# Altium PCB w32_dmx512-slaver_PCB.PcbDoc
Units mil, origin at the board's own origin, x right, y up, seen from the top; angles counter-clockwise.
Board outline 6000 x 4220 mil, 2 copper layers (Top Layer, Bottom Layer); 29 components, 34 nets, 120 pads, 0 vias.
Unrouted connection lines stored in the file: 54.
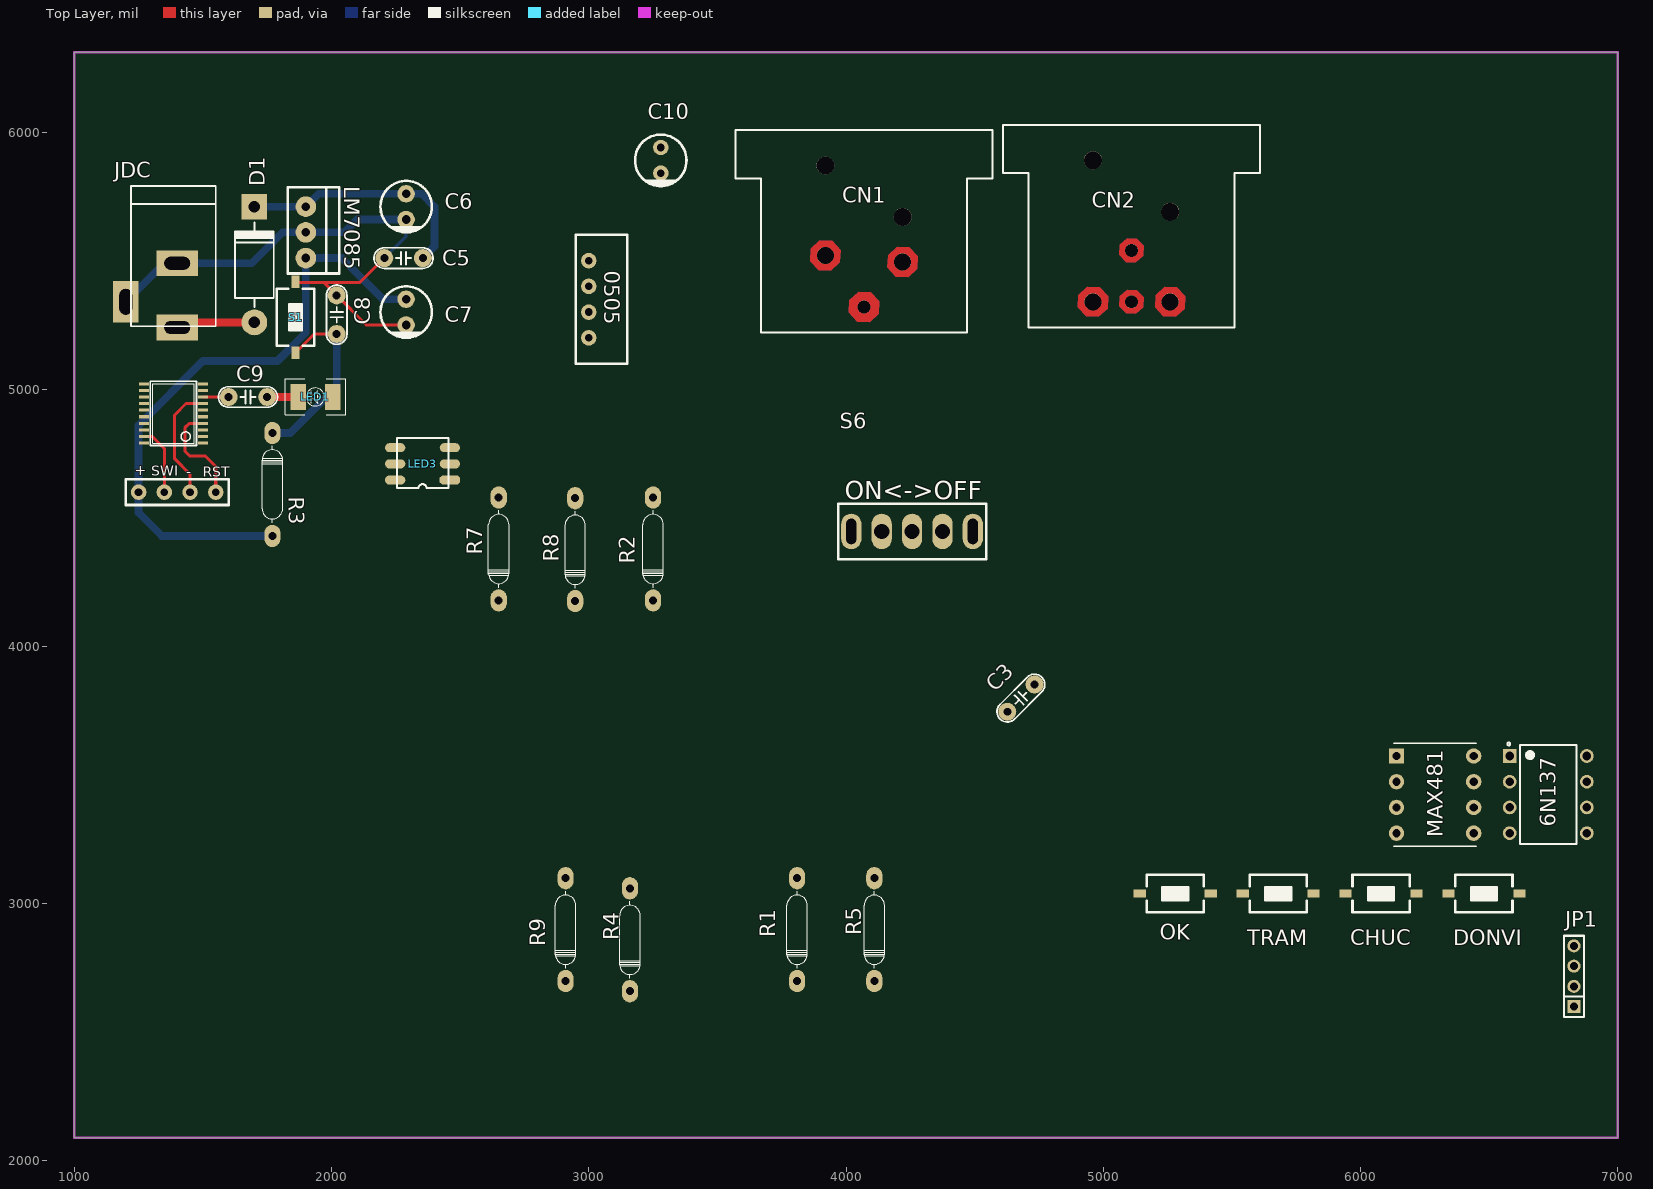
[diagram p0: Top Layer view]
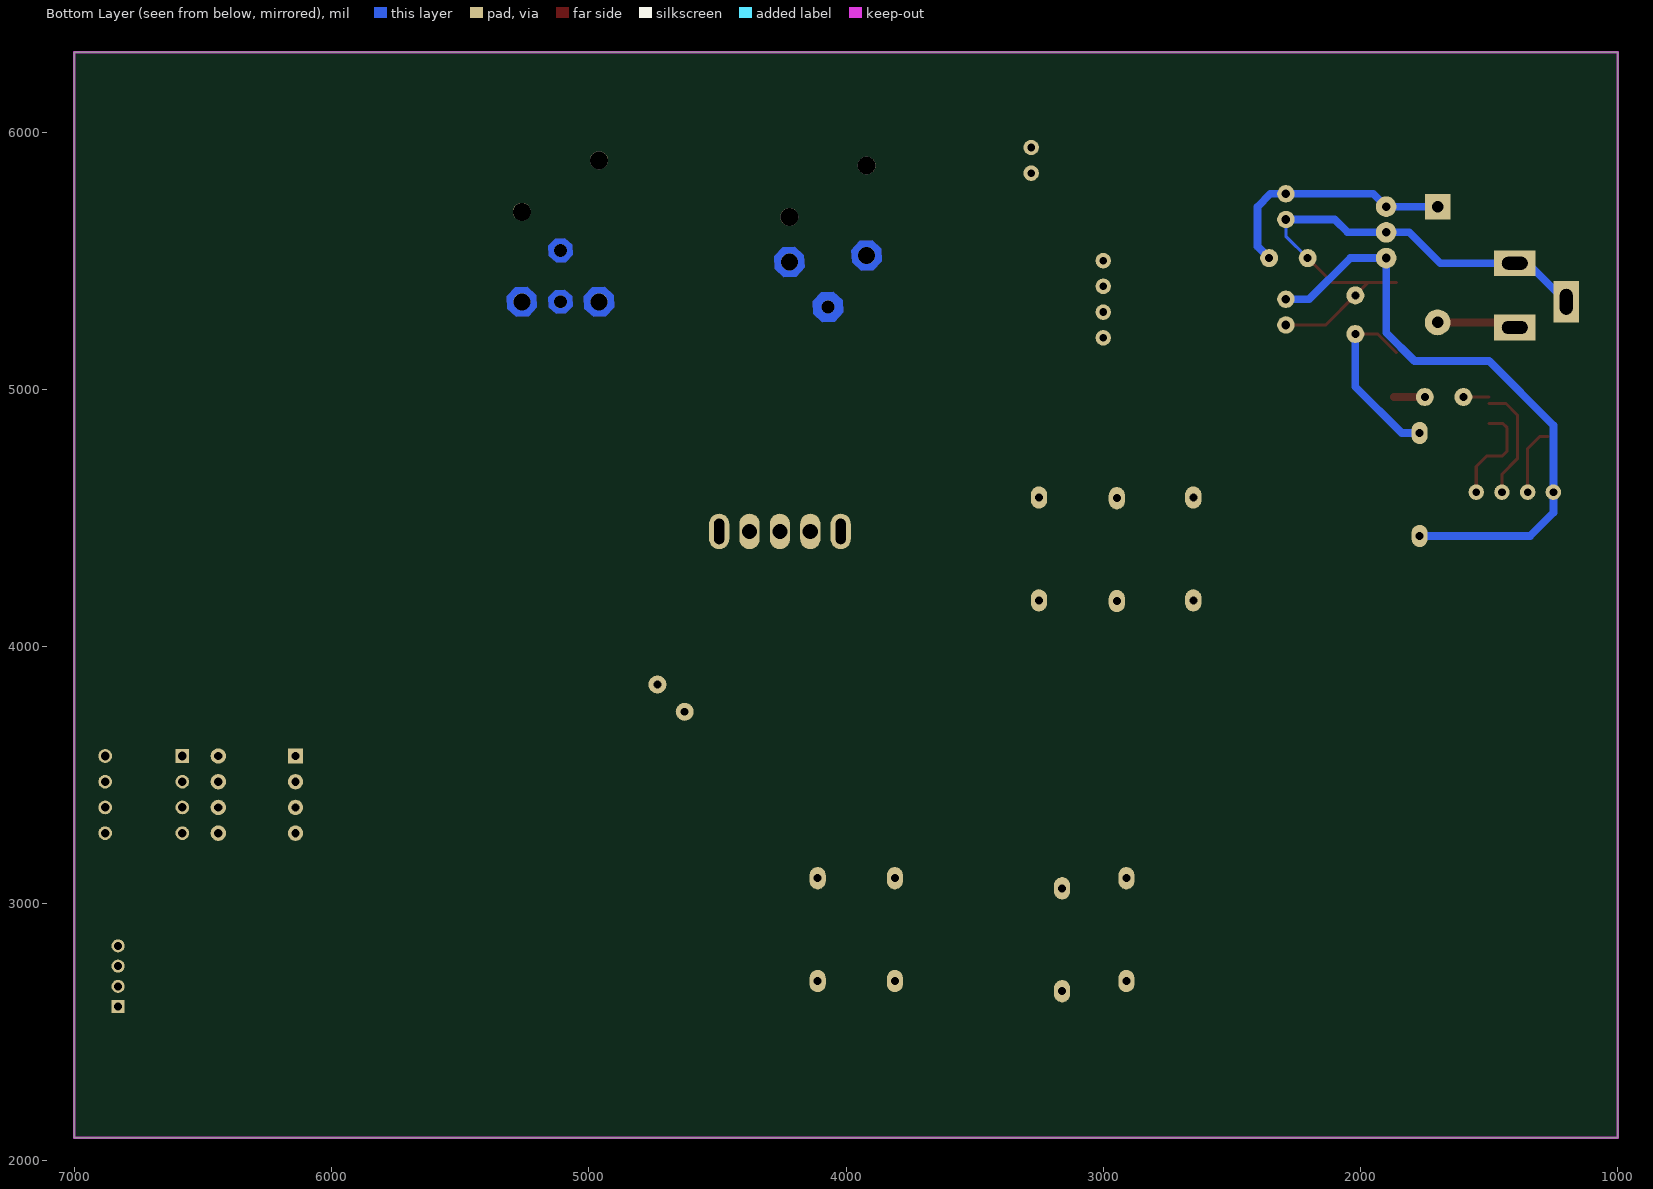
[diagram p1: Bottom Layer view, seen from below]

## Layer stack, top to bottom
Top Solder: solder mask 0.4, Solder Resist, Dk 3.5
Top Layer: signal copper 1.4
Dielectric 1: dielectric 12.6, FR-4, Dk 4.8
Bottom Layer: signal copper 1.4
Bottom Solder: solder mask 0.4, Solder Resist, Dk 3.5

## Board outline
1000,2090 1000,6310 7000,6310 7000,2090

## Design rules (kind name [scope] priority, off if disabled: settings)
Clearance [All] p1: gap=0 ignorepadtopadclearanceinfootprint=FALSE
PlaneConnect [All] p1: planeconnectstyle=Direct reliefexpansion=20 reliefentries=4 reliefconductorwidth=10 reliefairgap=10
PolygonConnect [All] p1: connectstyle=Direct reliefconductorwidth=10 reliefentries=4 polygonreliefangle="90 Angle" airgapwidth=10
RoutingVias [All] p1: holewidth=28 width=50 viastyle="Through Hole" minholewidth=28 minwidth=50 maxholewidth=28 maxwidth=50
SolderMaskExpansion [All] p1: expansion=4
Width [All] p1: maxlimit=30 minlimit=12 preferedwidth=20 minimp=50.000000 maximp=50.000000 favimp=50.000000
29 further rules are at their usual default settings.

## Components (designator, comment, footprint, x,y, rotation, side; value= is the part's Value field where it differs from the comment)
6N137 "6N137" DIP762W50P254L977H451Q8 6730,3424.37 r0 top
C3 "104" CN150 4680,3799.37 r45 top value=100nF
C5 "104" CN150 2280,5510 r0 top value=100nF
C8 "104" CN150 2020,5290 r90 top
C9 "104" CN150 1675,4970 r180 top
CHUC "SW-SMD" SW-SMD#1 6080,3039.37 r0 top
CN1 "NC3FBH1" NC3FBH1 4070,5520 r0 top
CN2 "NC3MBH" NC3MBH_NC3MBH(Primary) 5110,5540 r0 top
D1 "1N4007" D2A 1700,5710 r270 top
DONVI "SW-SMD" SW-SMD#1 6480,3039.37 r0 top
IC2 "STM8S003F3P6" TSSOP20 1385.13,4906.02 r90 top
JDC "Jac DC" DC-IN 1300,5365 r270 top
JP1 "JP4x1-2.0" J4-D1T 6830,2718.11 r90 top
LED1 "LED" LED-RED-0805 2005,4970 r180 top value="LED 3 - 5 ly 2 Colour"
LED3 "150141M173100" "LED RGB 5050" 2350,4710 r180 top
LM7085 "LM7805" 7805 1900,5610 r270 top
MAX481 "MAX481CPA" 21-0043D_8 6440,3274.37 r0 top
OK "SW-SMD" SW-SMD#2 5280,3039.37 r180 top
R1 "R0.4W" "DIEN TRO 1/4 W" 3810,2699.37 r90 top value=470
R2 "R0.4W" "DIEN TRO 1/4 W" 3250,4179.37 r90 top value=1k
R3 "R0.4W" "DIEN TRO 1/4 W" 1770,4830 r270 top value=1k
R4 "R0.4W" "DIEN TRO 1/4 W" 3160,2660 r90 top value=1k
R5 "R0.4W" "DIEN TRO 1/4 W" 4110,2699.37 r90 top value=470
R7 "R0.4W" "DIEN TRO 1/4 W" 2650,4179.37 r90 top value=1k
R8 "R0.4W" "DIEN TRO 1/4 W" 2947.16,4176.53 r90 top value=1k
R9 "R0.4W" "DIEN TRO 1/4 W" 2910,2699.37 r90 top value=120
S1 "SW-SMD" SW-SMD#1 1860,5280 r90 top
S6 "Switch" Switch 4020.67,4447.37 r0 top
TRAM "SW-SMD" SW-SMD#2 5680,3039.37 r180 top

## Footprints (in the part's own frame and the unit in brackets; to place one, negate y for a bottom-side part, rotate by r counter-clockwise, add the part's x,y. Pads: shape width x height; smd on the part's side, far side on the other; paste and mask are expansions set on the pad)
21-0043D_8 [mil]
  rect 60x60 hole 32: 1(-300,300)
  round 60 hole 32: 2(-300,200) 3(-300,100) 4(-300,0) 5(0,0) 6(0,100) 7(0,200) 8(0,300)
  silkscreen extent -310,-50 10,350
7805 [mil]
  round 80 hole 34: 1(-100,0) 2(0,0) 3(100,0)
  silkscreen extent -175,-70 160,130
CN150 [mil]
  round 70 hole 31: 1(-75,0) 2(75,0)
  silkscreen extent -115,-40 115,40, body extent -115,-33 115,33, height 235
D2A [mil] "Diode 2A, W 150mil, L 450mil"
  round 100 hole 45: 1(450,0)
  rect 100x100 hole 45: 2(0,0)
  silkscreen extent 61,-75 391,75, body extent 5,-47 435,54, height 100
DC-IN [mil] "Jac DC input"
  rect 100x160 hole 50 slot 100 at 90 deg: 1(125,100) 2(-125,100)
  rect 160x100 hole 50 slot 100 at 0 deg: 3(25,-100)
  silkscreen extent -425,-80 120,250, body extent -410,-105 134,269, height 434
"DIEN TRO 1/4 W" [mm]
  oval 2.2x1.6 hole 0.787: 1(0,0) 2(10.16,0)
  silkscreen extent 1.26,-1.02 8.88,1.02, body extent -0.3,-1.16 10.46,1.16, height 2.93
DIP762W50P254L977H451Q8 [mm]
  rect 1.35x1.35 hole 0.85: 1(-3.81,3.81)
  round 1.35 hole 0.85: 2(-3.81,1.27) 3(-3.81,-1.27) 4(-3.81,-3.81) 5(3.81,-3.81) 6(3.81,-1.27) 7(3.81,1.27) 8(3.81,3.81)
  silkscreen extent -4.04,-4.9 2.8,5.14
J4-D1T [mm] "4 pins, 1 row, straight, gold plating"
  rect 1.3x1.3 hole 0.8: 1(-3,0)
  round 1.3 hole 0.8: 2(-1,0) 3(1,0) 4(3,0)
  silkscreen extent -4,-1 4,1, body extent -4,-1 4,1, height 6.01
"LED RGB 5050" [mm]
  oct 2x0.9 smd: 1(-2.794,1.6)
  oval 2x0.9 smd: 2(-2.794,0) 3(-2.794,-1.6) 4(2.606,-1.6) 5(2.606,0) 6(2.606,1.6)
  silkscreen extent -2.67,-2.54 2.41,2.4, body extent -2.78,-2.54 2.52,2.46, height 1.6
LED-RED-0805 [mil]
  rect 60x100 smd: 1(0,0) 2(135,0)
  silkscreen extent -50,-70 185,70, body extent -20,-60 154,60, height 75
NC3FBH1 [mil]
  round 66 hole 66: 1(-150,0) 2(150,-25)
  round 50 hole 50: 3(0,-200)
  round 70 hole 70 unplated: None(-150,350) None(150,150)
  Top Layer region: -91.27,21.38 -123.59,56.64 -171.38,58.73 -206.64,26.41 -208.73,-21.38 -176.41,-56.64 -128.62,-58.73 -93.36,-26.41
  Top Layer region: 58.73,-178.62 26.41,-143.36 -21.38,-141.27 -56.64,-173.59 -58.73,-221.38 -26.41,-256.64 21.38,-258.73 56.64,-226.41
  Top Layer region: 208.73,-3.62 176.41,31.64 128.62,33.73 93.36,1.41 91.27,-46.38 123.59,-81.64 171.38,-83.73 206.64,-51.41
  Bottom Layer region: -91.27,21.38 -123.59,56.64 -171.38,58.73 -206.64,26.41 -208.73,-21.38 -176.41,-56.64 -128.62,-58.73 -93.36,-26.41
  Bottom Layer region: 58.73,-178.62 26.41,-143.36 -21.38,-141.27 -56.64,-173.59 -58.73,-221.38 -26.41,-256.64 21.38,-258.73 56.64,-226.41
  Bottom Layer region: 208.73,-3.62 176.41,31.64 128.62,33.73 93.36,1.41 91.27,-46.38 123.59,-81.64 171.38,-83.73 206.64,-51.41
  Multi-Layer region: -91.27,21.38 -123.59,56.64 -171.38,58.73 -206.64,26.41 -208.73,-21.38 -176.41,-56.64 -128.62,-58.73 -93.36,-26.41
  Multi-Layer region: 58.73,-178.62 26.41,-143.36 -21.38,-141.27 -56.64,-173.59 -58.73,-221.38 -26.41,-256.64 21.38,-258.73 56.64,-226.41
  Multi-Layer region: 208.73,-3.62 176.41,31.64 128.62,33.73 93.36,1.41 91.27,-46.38 123.59,-81.64 171.38,-83.73 206.64,-51.41
  silkscreen extent -500,-300 500,488
NC3MBH_NC3MBH(Primary) [mil]
  round 66 hole 66: 1(150,-200) 2(-150,-200)
  round 50 hole 50: 3(0,-200) G(0,0)
  round 70 hole 70 unplated: None(-150,350) None(150,150)
  Top Layer region: 208.73,-178.62 176.41,-143.36 128.62,-141.27 93.36,-173.59 91.27,-221.38 123.59,-256.64 171.38,-258.73 206.64,-226.41
  Top Layer region: 46.98,-182.9 21.13,-154.68 -17.1,-153.02 -45.32,-178.87 -46.98,-217.1 -21.13,-245.32 17.1,-246.98 45.32,-221.13
  Top Layer region: -91.27,-178.62 -123.59,-143.36 -171.38,-141.27 -206.64,-173.59 -208.73,-221.38 -176.41,-256.64 -128.62,-258.73 -93.36,-226.41
  Top Layer region: 46.98,17.1 21.13,45.32 -17.1,46.98 -45.32,21.13 -46.98,-17.1 -21.13,-45.32 17.1,-46.98 45.32,-21.13
  Bottom Layer region: 208.73,-178.62 176.41,-143.36 128.62,-141.27 93.36,-173.59 91.27,-221.38 123.59,-256.64 171.38,-258.73 206.64,-226.41
  Bottom Layer region: 46.98,-182.9 21.13,-154.68 -17.1,-153.02 -45.32,-178.87 -46.98,-217.1 -21.13,-245.32 17.1,-246.98 45.32,-221.13
  Bottom Layer region: -91.27,-178.62 -123.59,-143.36 -171.38,-141.27 -206.64,-173.59 -208.73,-221.38 -176.41,-256.64 -128.62,-258.73 -93.36,-226.41
  Bottom Layer region: 46.98,17.1 21.13,45.32 -17.1,46.98 -45.32,21.13 -46.98,-17.1 -21.13,-45.32 17.1,-46.98 45.32,-21.13
  Multi-Layer region: 208.73,-178.62 176.41,-143.36 128.62,-141.27 93.36,-173.59 91.27,-221.38 123.59,-256.64 171.38,-258.73 206.64,-226.41
  Multi-Layer region: 46.98,-182.9 21.13,-154.68 -17.1,-153.02 -45.32,-178.87 -46.98,-217.1 -21.13,-245.32 17.1,-246.98 45.32,-221.13
  Multi-Layer region: -91.27,-178.62 -123.59,-143.36 -171.38,-141.27 -206.64,-173.59 -208.73,-221.38 -176.41,-256.64 -128.62,-258.73 -93.36,-226.41
  Multi-Layer region: 46.98,17.1 21.13,45.32 -17.1,46.98 -45.32,21.13 -46.98,-17.1 -21.13,-45.32 17.1,-46.98 45.32,-21.13
  silkscreen extent -500,-300 500,488
SW-SMD#1 [mm] "Switch SMD type"
  rect 1.2x0.8 smd: 1(-3.5,0) 2(3.5,0)
  silkscreen extent -2.82,-1.85 2.82,1.85, body extent -3.05,-1.85 3.05,1.85, height 2.5
SW-SMD#2 [mm] "Switch SMD type"
  rect 1.2x0.8 smd: 1(3.5,0) 2(-3.5,0)
  silkscreen extent -2.82,-1.85 2.82,1.85, body extent -3.05,-1.85 3.05,1.85, height 2.5
Switch [mm]
  oval 2x3.5 hole 1.5: 1(3,0) 2(6,0) 3(9,0)
  oval 2x3.5 hole 1 slot 2.5 at 90 deg: 4(0,0) 5(12,0)
  silkscreen extent -1.27,-2.73 13.34,2.73, body extent -0.5,-2.85 12.5,9.35, height 2.6
TSSOP20 [mil]
  rect 12x39 smd: 1(-115.16,-114.87) 2(-89.57,-114.87) 3(-63.98,-114.87) 4(-38.39,-114.87) 5(-12.8,-114.87) 6(12.8,-114.87) 7(38.39,-114.87) 8(63.98,-114.87) 9(89.57,-114.87) 10(115.16,-114.87) 11(115.16,114.87) 12(89.57,114.87) 13(63.98,114.87) 14(38.39,114.87) 15(12.8,114.87) 16(-12.8,114.87) 17(-38.39,114.87) 18(-63.98,114.87) 19(-89.57,114.87) 20(-115.16,114.87)
  silkscreen extent -125,-90 125,90

## Part data
6N137: "High CMR, High Speed TTL Compatible Optocouplers", Package="DIP-8 Broadcom", Availability=Warning, MF="Vishay Semiconductor", MP=6N137, Price="1.38 USD", SnapEDA_Link=https://www.snapeda.com/symbols-footprints/6N137/Vishay%20Semiconductor%20Opto%20Division/view-part/?ref=snap
C3 C5 C8 C9: library part CN1.5, "Capacitor Ceramic"
CHUC DONVI OK S1 TRAM: "Switch", LatestRevisionDate=17-Jul-2002, LatestRevisionNote="Re-released for DXP Platform.", PackageReference=SPST-2, Published=24-Mar-1999, Publisher="Altium Limited"
CN1: "XLR Receptacle; Female; Gold; Horizontal PCB Mount; 0.996 in.; Ground", Package=None, Availability=Good, MF=Neutrik, MP=NC3FBH1, Price="2.36 USD", SnapEDA_Link=https://www.snapeda.com/symbols-footprints/NC3FBH1/Neutrik/view-part/?ref=snap
CN2: "Conn XLR Connector Adapter M 3 POS Solder RA Thru-Hole 3 Terminal 1 Port", Package=None, Availability=Good, MF=Neutrik, MP=NC3MBH, Price="2.21 USD", SnapEDA_Link=https://www.snapeda.com/symbols-footprints/NC3MBH/Neutrik/view-part/?ref=snap
D1: library part D1A, "Diode 1A"
IC2: "Mainstream Value line 8-bit MCU with 8 Kbytes Flash, 16 MHz CPU, integrated EEPROM", Package="TSSOP-20 STMicroelectronics", Availability=Bad, MF=STMicroelectronics, MP=STM8S003F3P6, Price="0.58 USD", SnapEDA_Link=https://www.snapeda.com/symbols-footprints/STM8S003F3P6/STMicroelectronics/view-part/?ref=snap
JDC: library part DCIN, "Jac DC input"
JP1: "WR-PHD 2.00 mm Socket Header", Manufacturer="Würth Elektronik eiSos GmbH", PartNo=62000411821, ComponentLink1 Description=Manufacturer, ComponentLink1URL=http://www.we-online.com, ComponentLink2 Description=Datasheet, ComponentLink2URL=http://katalog.we-online.de/em/datasheet/6200xx11821.pdf, Created by="Karrer Zheng", Created Date="2 April 2013", NoPins=04
LED1: library part "LED SMD"
LED3: library part "LED RGB 5050", Color="Red & Green & Blue", Manufacturer="Würth Elektronik eiSos GmbH", ComponentLink1Description=Manufacturer, ComponentLink1URL=http://www.we-online.de, ComponentLink2Description=Datasheet, ComponentLink2URL=http://katalog.we-online.com/led/datasheet/150141M173100.pdf, Created by="Christin Otto", Created Date="June 2013", PartNo=150141M173100
MAX481: "Single Transmitter/Receiver RS-422/RS-485 8-Pin PDIP N", Package="DIP-8 Maxim Integrated", Availability=Warning, MF="Maxim Integrated", MP=MAX481CPA, Price="1.85 USD", SnapEDA_Link=https://www.snapeda.com/symbols-footprints/MAX481CPA/Maxim%20Integrated/view-part/?ref=snap
R1 R2 R3 R4 R5 R7 R8 R9: library part "Res 1/4 W", "Resistor", LatestRevisionDate=17-Jul-2002, LatestRevisionNote="Re-released for DXP Platform.", PackageReference=AXIAL-0.4, Published=8-Jun-2000, Publisher="Altium Limited"

## Free pads (board coordinates)
  round 60 hole 30: 4(3000,5500) 5(3000,5400) 6(3000,5300) 7(3000,5200) 8(1250,4600) 9(1350,4600) 10(1450,4600) 11(1550,4600) 18(3280,5940) 19(3280,5840)
  round 68 hole 34: 12(2290,5660) 13(2290,5760) 14(2290,5350) 15(2290,5250)

## Nets (pads, with @x,y where several pads share a name; then routed paths per layer and width w, separated by ;. In a path a pad name is that pad's centre, name@x,y a point inside that pad or via, vN(x,y) a via of type N, cw(c..) or ccw(c..) an arc to the next point about the centre after c; other vN are vias at no path point)
+5V: 6N137.8 IC2.9 JP1.4 LM7085.3 pad.7 pad.8 pad.14 R1.2 R3.2 R4.2 | length 2442.7
  Bottom Layer w30: R3.2 1340,4430 1250,4520 pad.8 1250,4860 1500,5110 1790,5110 1900,5220 LM7085.3 2040,5510 2200,5350 pad.14
BLUE: IC2.10 LED3.6
CHUC: CHUC.2 IC2.6
DONVI: DONVI.2 IC2.5
GISOL: C3.1 CN1.1 CN2.1 CN2.G MAX481.2 MAX481.3 MAX481.4 MAX481.5 pad.5 pad.19
GND: 6N137.5 C5.1 C8.2 C9.1 CHUC.1 DONVI.1 IC2.7 JDC.2 JDC.3 JP1.2 LED1.2 LM7085.2 OK.1 pad.6 pad.10 pad.12 pad.15 S1.2 TRAM.1 | length 2754.3
  Top Layer w12: pad.10 1450,4670 1390,4730 1390,4900 1434.41,4944.41 IC2.7 ; S1.2@1860,5415.59 1969.41,5415.59 ; C5.1 2110.59,5415.59 1969.41,5415.59 ; pad.15 2135,5250 C8.2 1969.41,5415.59
  Top Layer w30: C9.1 LED1.2
  Bottom Layer w12: C5.1 2290,5595 pad.12
  Bottom Layer w30: JDC.3 1350,5490 JDC.2 1690,5490 1810,5610 LM7085.2 2050,5610 2100,5660 pad.12
GREEN: IC2.20 LED3.4
Net6N137_3: 6N137.3 R5.1
NetC5_2: C5.2 D1.2 LM7085.1 pad.13 | length 960.1
  Bottom Layer w30: D1.2 LM7085.1 1950,5760 pad.13 2350,5760 2400,5710 2400,5555 C5.2
NetCN1_2: CN1.2 CN2.2 MAX481.6 R9.1
NetCN1_3: CN1.3 CN2.3 MAX481.7 S6.1
NetD1_1: D1.1 JDC.1 | length 336.6
  Top Layer w30: JDC.1 1420,5260 D1.1
  Bottom Layer w30: D1.1@1680,5240 D1.1
NetLED1_1: LED1.1 R4.1
NetLED3_1: LED3.1 R2.1
NetLED3_2: LED3.2 R7.1
NetLED3_3: LED3.3 R8.1
NetMAX481_1: MAX481.1 R5.2
NetR2_2: R2.2 R7.2 R8.2
NetR9_2: R9.2 S6.2
NRST: C8.1 IC2.4 JP1.1 pad.11 R3.1 S1.1 | length 1131.9
  Top Layer w12: IC2.4 1447.64,4867.64 1430,4850 1430,4760 1450,4740 1510,4740 1550,4700 pad.11 ; S1.1 1932.8,5215 C8.1
  Bottom Layer w30: R3.1 1840,4830 2020,5010 C8.1
OK: IC2.11 OK.2
PB4: IC2.12
PC3: IC2.13
PC4: IC2.14
PC5: IC2.15
PC6: IC2.16
PC7: IC2.17
PD1: IC2.18 TRAM.2
PD2: IC2.19 JP1.3 pad.9 | length 269
  Top Layer w12: IC2.19 1303.54,4816.46 1350,4770 pad.9
PD4: LED3.5
PD5: IC2.2
PD6: 6N137.6 IC2.3 R1.1
VCAP: C9.2 IC2.8 | length 100
  Top Layer w12: IC2.8 C9.2
VISOL: 6N137.2 C3.2 MAX481.8 pad.4 pad.18
pads on no net: 6N137.1 6N137.4 6N137.7 CN1.None CN2.None IC2.1 S6.3 S6.4 S6.5

## Keep-outs
Keep-Out Layer:
  the board outline again, w10

## Silkscreen, mask and mechanical layers (free items; w line width, h text height)
Top Overlay:
  circle w10: c3280,5890 r100
  circle w10: c2290,5300 r100
  circle w10: c2290,5710 r100
  lines w10: 2230,5220 2347,5220 ; 2230,5630 2347,5630 ; 2247,5210 2333,5210 ; 2247,5620 2333,5620 ; 3220,5810 3337,5810 ; 3237,5800 3323,5800 ; 1200,4550 1600,4550 1600,4650 1200,4650 1200,4550 ; 2950,5100 2950,5600 3150,5600 3150,5100 2950,5100
  text "C10" at 3230,6050 h60
  text "C6" at 2440,5700 h60
  text "0505" at 3060,5460 h60 r270
  text "C7" at 2440,5260 h60
  text "+" at 1235,4665 h40
  text "SWI" at 1298.23,4664.54 h40
  text "-" at 1435,4660 h40
  text "RST" at 1500,4660 h40

## Text inside footprints (layer, text, board x,y; h text height)
CN1: Mechanical 1 "1" at 3819.87,5535.17 h73.82; Mechanical 1 "3" at 3969.79,5334.79 h73.82; Mechanical 1 "2" at 4120.14,5510.16 h73.82
CN2: Mechanical 1 "1" at 5260.36,5404.86 h73.82; Mechanical 1 "3" at 5110,5405.07 h73.82; Mechanical 1 "2" at 4959.75,5404.95 h73.82; Mechanical 1 "G" at 5110,5605.3 h73.82
S6: Top Overlay "ON<->OFF" at 3995.67,4572.37 h70.87